# EAGLE board ESP32-DivKitC Pro PCB Updated (EAGLE 9.5.1)
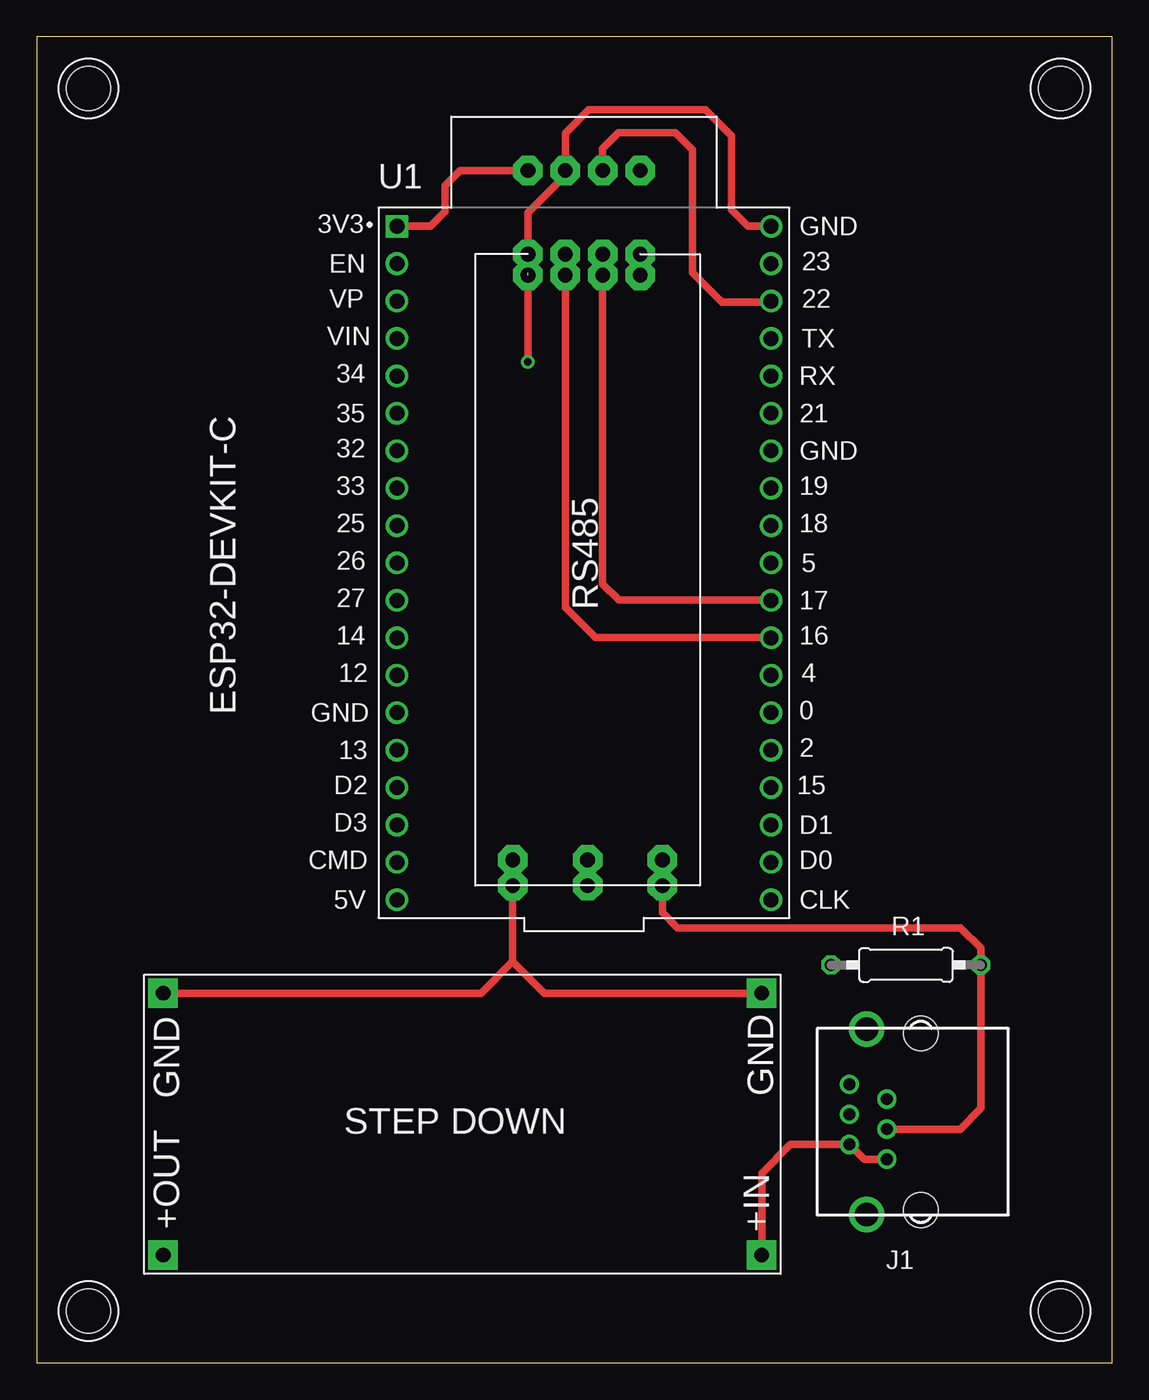
[diagram p0: board, top side]
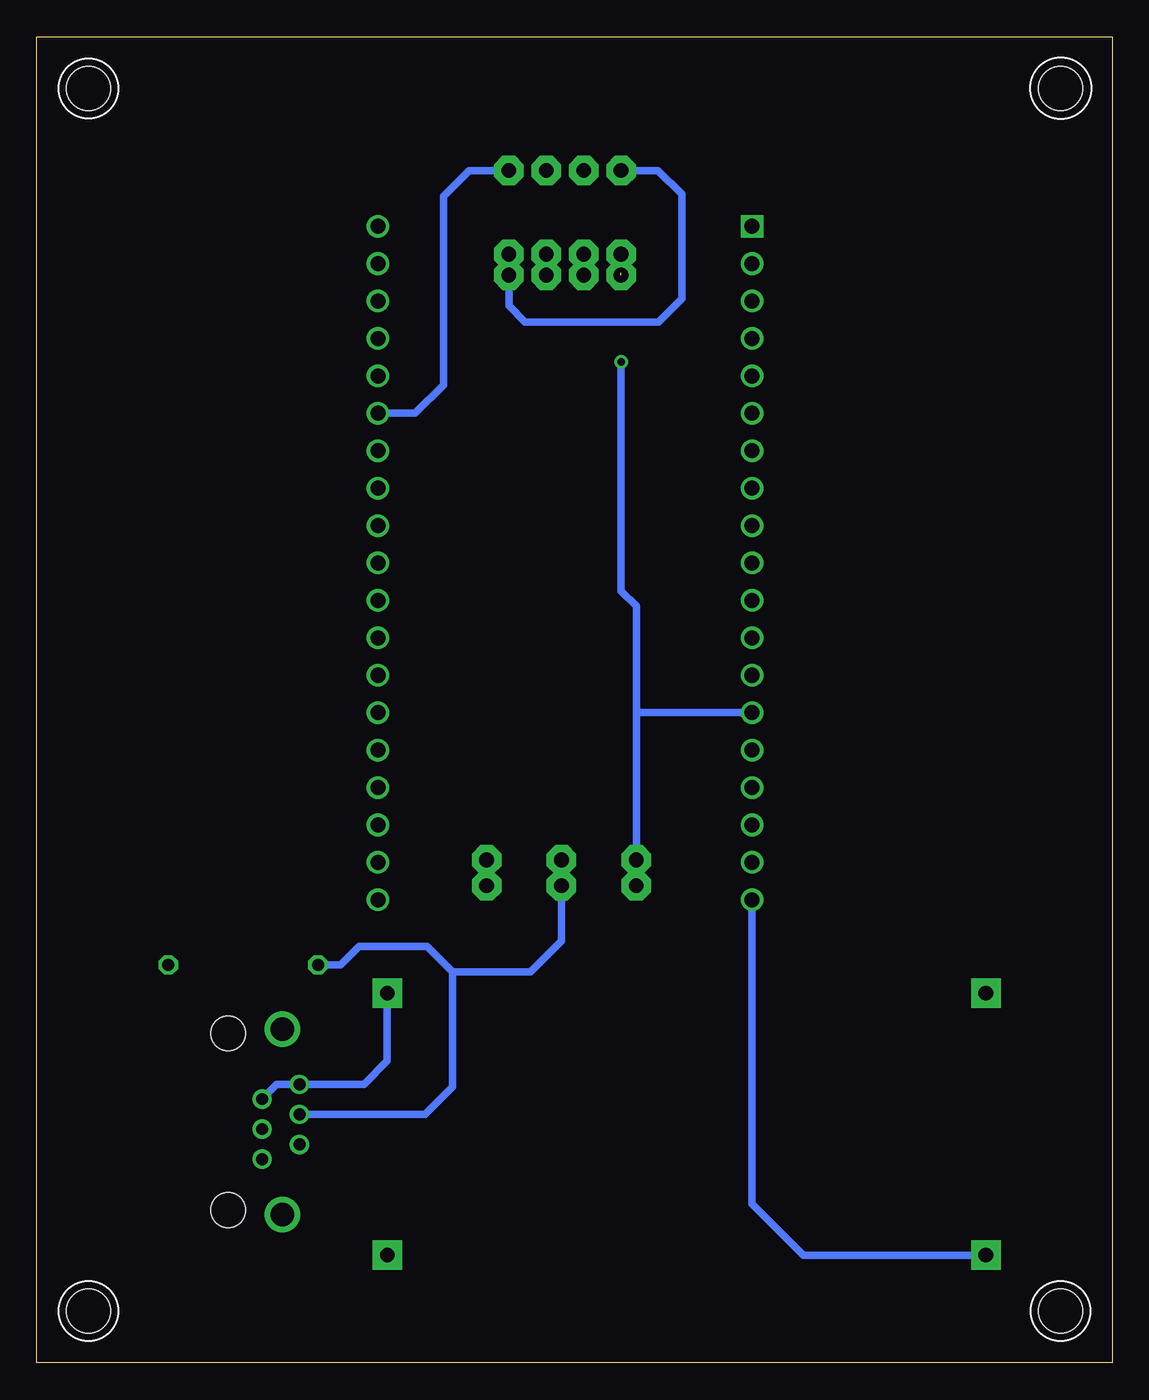
[diagram p1: board, bottom side, seen from below]

Size 73 x 90 mm. Coordinates in mm from the lower left corner, seen from the top.
Outline: 0,0 73,0 73,90 0,90 0,0
Copper layers (1*16): Top 0.035mm / dielectric 1.5mm / Bottom 0.035mm
Design rules "default *": minimum track width 6mil, minimum drill 0.2mm, track to track 6mil, track to pad 6mil, pad to pad 6mil, via to via 6mil, smd to smd 6mil, copper to edge 40mil, drill to drill 6mil, minimum pad ring 10mil, minimum via ring 8mil, stop-mask expansion 4mil, vias tented up to drill 0mil, thermal gap 10mil
Holes 3 mm at 3.5,3.5 3.5,86.5 69.5,86.5 69.5,3.5

## Footprints (pad centres in the part's own frame; a part is rotated, then mirrored left to right if it is on the bottom)
YH-55-10 = drill 0.8 pad 1.3: 1 -2.54,2.3; 2 -1.54,4.84; 3 -0.5,2.3; 4 0.5,4.84; 5 1.54,2.3; 6 2.54,4.84 | drill 1.6 pad 2.184: S1 -6.3,3.68; S2 6.3,3.68 | hole 2.36: -6,0; 6,0
0207/10 = drill 0.813 octagon: 1 -5.08,0; 2 5.08,0
MODULE_ESP32-DEVKITC = drill 1.02 square: 1 -12.7,22.85 | drill 1.02: 2 -12.7,20.31; 3 -12.7,17.77; 4 -12.7,15.23; 5 -12.7,12.69; 6 -12.7,10.15; 7 -12.7,7.61; 8 -12.7,5.07; 9 -12.7,2.53; 10 -12.7,-0.01; 11 -12.7,-2.55; 12 -12.7,-5.09; 13 -12.7,-7.63; 14 -12.7,-10.17; 15 -12.7,-12.71; 16 -12.7,-15.25; 17 -12.7,-17.79; 18 -12.7,-20.33; 19 -12.7,-22.87; 20 12.7,-22.87; 21 12.7,-20.33; 22 12.7,-17.79; 23 12.7,-15.25; 24 12.7,-12.71; 25 12.7,-10.17; 26 12.7,-7.63; 27 12.7,-5.09; 28 12.7,-2.55; 29 12.7,-0.01; 30 12.7,2.53; 31 12.7,5.07; 32 12.7,7.61; 33 12.7,10.15; 34 12.7,12.69; 35 12.7,15.23; 36 12.7,17.77; 37 12.7,20.31; 38 12.7,22.85

## Placement (x,y rotation side)
J1  RJ11  [YH-55-10]  60.01,16.35 90 top
R1  120R  [0207/10]  59,27 0 top
U1  ESP32-DEVKITC  [MODULE_ESP32-DEVKITC]  37.15,54.29 0 top

## Library data of the parts
J1 = con-wenzhou-yihua
R1 = rcl
U1 = ESP32-DEVKITC; AVAILABILITY: In Stock; DESCRIPTION: - ESP32-WROOM32 Transceiver; 802.11 b/g/n (Wi-Fi, WiFi, WLAN), Bluetooth® Smart 4.x Low Energy (BLE) 2.4GHz Evaluation Board; MF: Olimex LTD; MP: ESP32-DEVKITC; PACKAGE: None; PRICE: None; PURCHASE-URL: https://pricing.snapeda.com/search/part/ESP32-DEVKITC/?ref=eda

## Nets
3V3: U1.1
EXT_5V: U1.19
GND: J1.5 J1.6 U1.14 U1.38
GND2: U1.32
S$2: J1.1 J1.2
S$3: J1.3 R1.2
S$38: J1.4 R1.1

## Tracks (layer width: path | path; a pad name or v marks a point on that pad's centre or on a via)
3V3  (via drill 1 pad 2)
  Top 0.508: 40.96,73.98 v40.96,75.25 v40.96,73.82 | U1.1 26.72,77.14 27.7,78.12 27.7,79.88 28.74,80.92 v33.34,80.92
  Bottom 0.508: v33.34,80.92 30.82,80.92 29.21,79.31 29.21,72.23 30.8,70.64 39.85,70.64 40.96,71.75 v40.96,73.82
EXT_5V  (via drill 1 pad 2)
  Bottom 0.508: U1.19 24.45,10.79 20.95,7.3 v8.57,7.3
GND  (via drill 0.5 pad 0.7, 1 pad 2)  (1 unrouted)
  Top 0.508: 33.34,73.98 v33.34,75.25 33.34,78.06 35.88,80.61 v35.88,80.92 35.88,83.46 37.47,85.05 45.4,85.05 47.15,83.3 47.15,78.26 48.27,77.14 U1.38 | v32.31,34.13 v32.31,32.38 32.31,27.23 | v33.34,73.82 v33.34,67.94 | v49.21,25.08 34.45,25.08 32.31,27.23 | v8.57,25.08 30.16,25.08 32.31,27.23
  Bottom 0.508: v33.34,67.94 33.34,52.39 32.31,51.36 32.31,44.13 | 32.31,44.13 v32.31,34.13 | v49.21,25.08 49.21,20.48 50.8,18.89 J1.6 56.71,18.89 J1.5 | U1.14 32.3,44.12 32.31,44.13
S$1  (via drill 1 pad 2)
  Bottom 0.508: 49.85,64.45 47.31,64.45 45.4,66.36 45.4,79.18 43.66,80.92 v40.96,80.92
S$2  (via drill 1 pad 2)
  Top 0.508: v49.21,7.3 49.21,12.86 51.16,14.81 J1.2 56.17,13.81 J1.1
S$3  (via drill 1 pad 2)
  Top 0.508: v42.47,34.13 v42.47,32.38 42.47,30.56 43.5,29.53 62.71,29.53 64.08,28.15 R1.2 64.08,17.25 62.68,15.85 J1.3
S$4  (via drill 1 pad 2)
  Top 0.508: 49.85,49.21 37.94,49.21 35.88,51.28 35.88,66.36 35.88,66.52 v35.88,75.25 v35.88,73.82
S$5  (via drill 1 pad 2)
  Top 0.508: v38.42,80.92 38.42,82.42 39.5,83.5 43.34,83.5 44.5,82.34 44.5,74 46.5,72 50,72
S$6  (via drill 1 pad 2)
  Top 0.508: 49.85,51.75 39.53,51.75 38.42,52.86 38.42,64.45 38.42,64.61 v38.42,75.25 v38.42,73.82
S$38  (via drill 1 pad 2)
  Top 0.508: R1.1 53.91,27.01
  Bottom 0.508: 44.77,26.51 39.5,26.51 37.39,28.62 v37.39,32.38 v37.39,34.13 | R1.1 52.38,27 51.12,28.26 46.51,28.26 44.77,26.51 | 44.77,26.51 44.77,18.73 46.65,16.85 J1.4

## Text on the board
tPlace: 3V3 | GND | EN | 23 | VP | 22 | VIN | TX | 34 | RX | 35 | 21 | 32 | GND | 33 | 19 | 25 | 18 | 26 | 5 | 27 | RS485 | 17 | 14 | 16 | 12 | 4 | ESP32-DEVKIT-C | 0 | GND | 13 | 2 | D2 | 15 | D3 | D1 | CMD | D0 | 5V | CLK | GND | GND | STEP DOWN | +IN | +OUT